# Altium PCB PCB1.PcbDoc
Units mil, origin at the board's own origin, x right, y up, seen from the top; angles counter-clockwise.
Board outline 3005 x 2005 mil, 2 copper layers (Top Layer, Bottom Layer); 13 components, 7 nets, 36 pads, 0 vias.
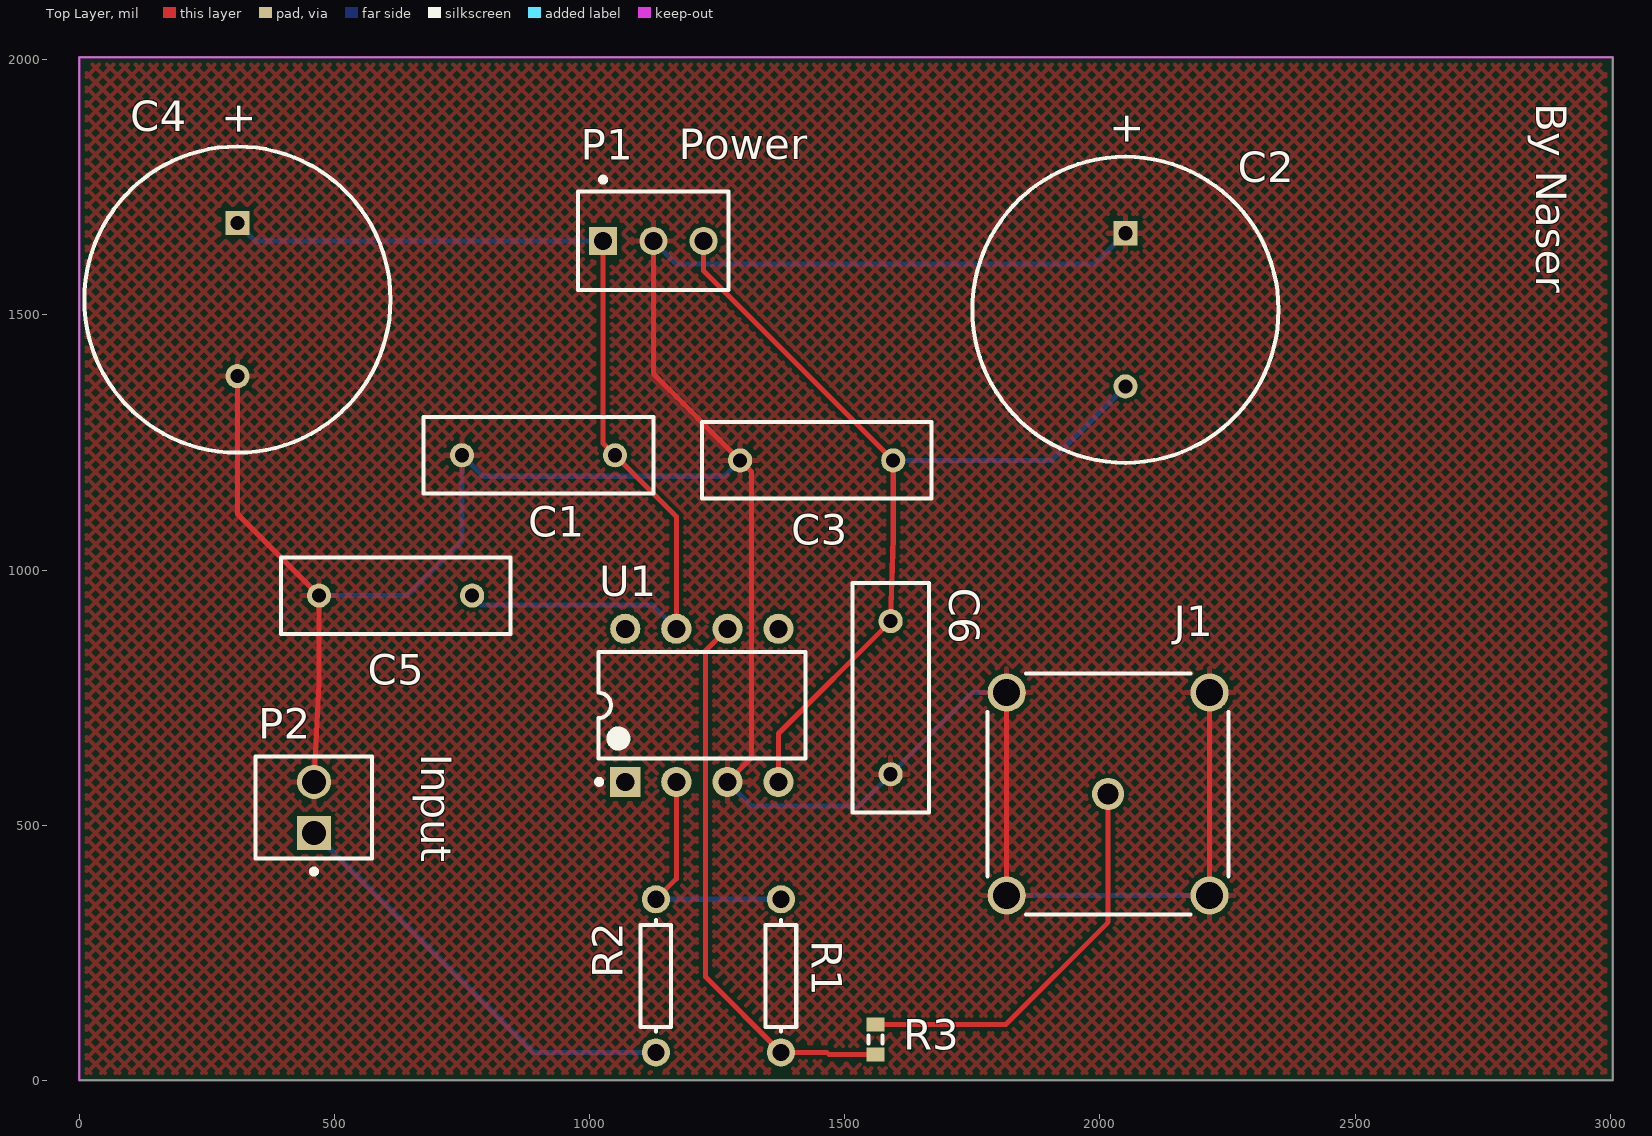
[diagram p0: Top Layer view]
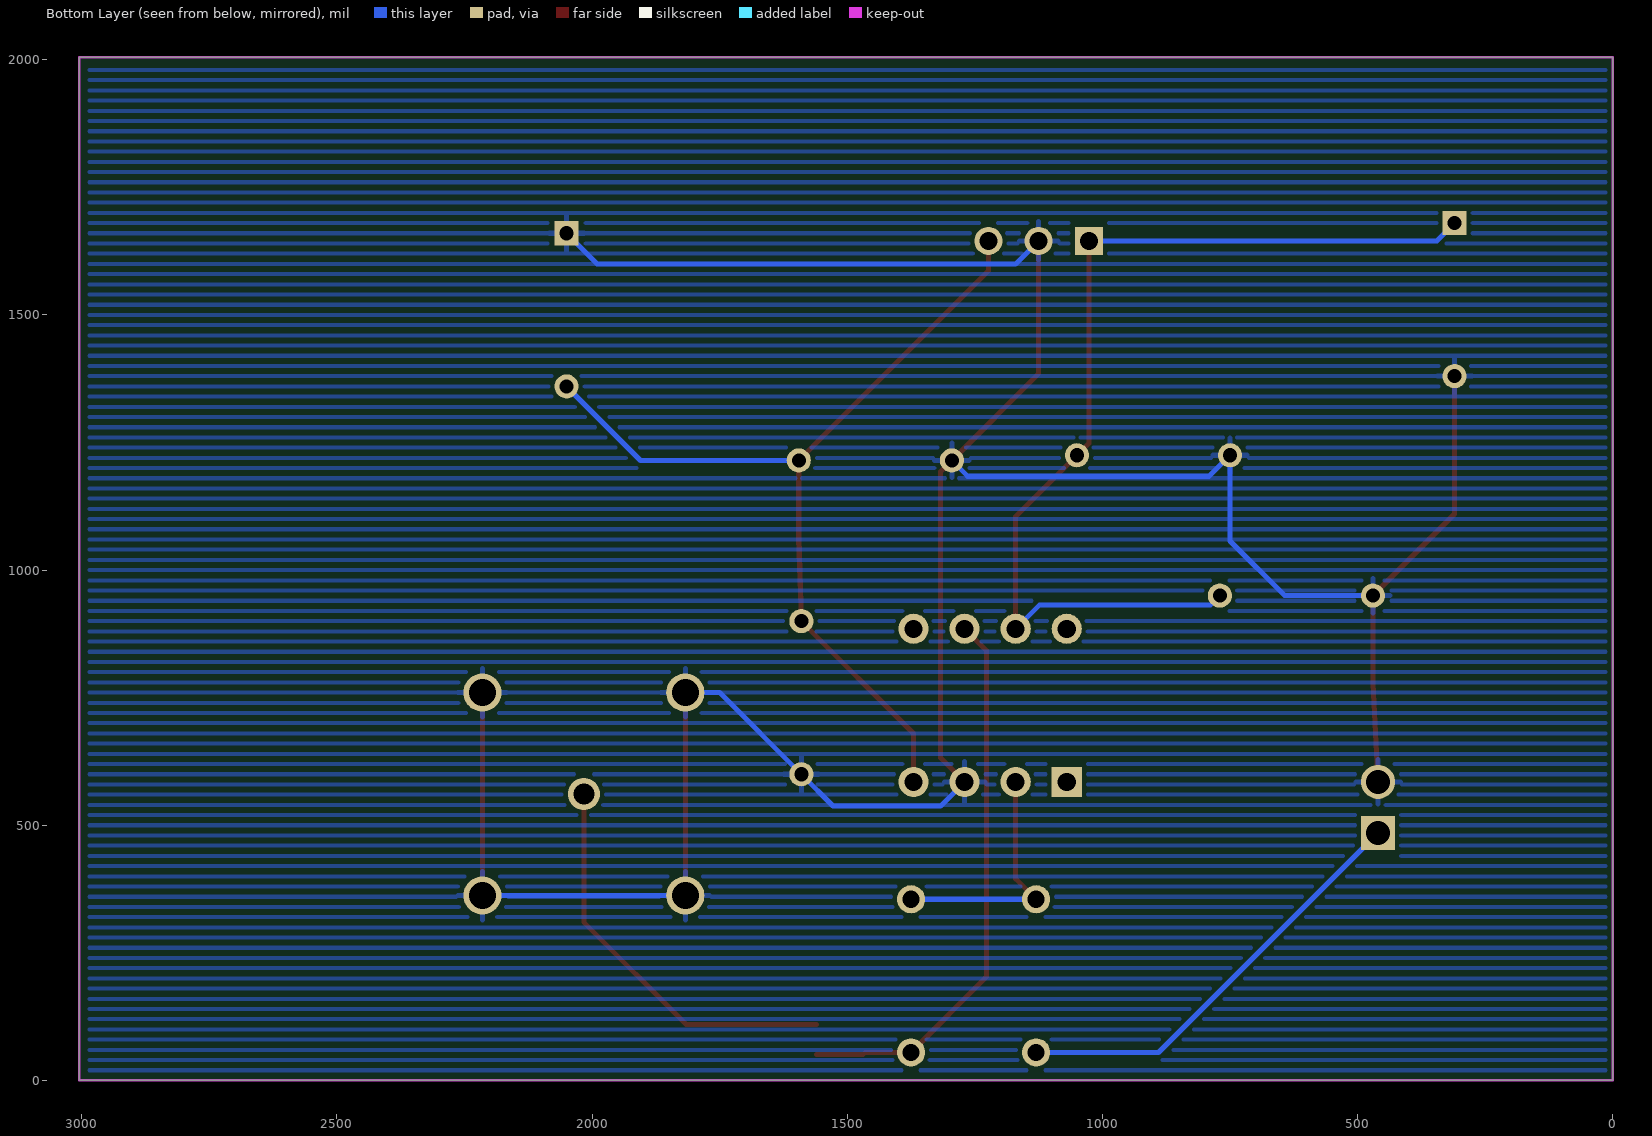
[diagram p1: Bottom Layer view, seen from below]

## Layer stack, top to bottom
Top Solder: solder mask 0.4, Solder Resist, Dk 3.5
Top Layer: signal copper 1.4
Dielectric 1: dielectric 12.6, FR-4, Dk 4.8
Bottom Layer: signal copper 1.4
Bottom Solder: solder mask 0.4, Solder Resist, Dk 3.5

## Board outline
0,0 3005,0 3005,2005 0,2005

## Design rules (kind name [scope] priority, off if disabled: settings)
Clearance [All] p1: gap=8 ignorepadtopadclearanceinfootprint=TRUE
MinimumSolderMaskSliver [All] p1: minsoldermaskwidth=1
PolygonConnect [All] p1: connectstyle=Relief reliefconductorwidth=10 reliefentries=4 polygonreliefangle="90 Angle" airgapwidth=10
RoutingVias [All] p1: holewidth=28 width=50 viastyle="Through Hole" minholewidth=28 minwidth=50 maxholewidth=28 maxwidth=50
SilkToSilkClearance [All] p1: silktosilkclearance=1
SilkToSolderMaskClearance [IsPad] p1: minsilkscreentomaskgap=1 clearancetoexposedcopper=TRUE
SolderMaskExpansion [All] p1: expansion=4 istentingtop=FALSE
Width [All] p1: maxlimit=10 minlimit=10 preferedwidth=10
27 further rules are at their usual default settings.

## Classes and differential pairs
component class power: C1 C2 C3 C4 P1
component class opamp: C5 C6 J1 P2 R1 R2 R3 U1

## Components (designator, comment, footprint, x,y, rotation, side; value= is the part's Value field where it differs from the comment)
C1 "Cap" RAD-0.3 900,1225 r0 top value=100nF
C2 "Cap Pol1" RB7.6-15 2050,1510 r90 top value=100uF
C3 "Cap" RAD-0.3 1445,1215 r0 top value=100nF
C4 "Cap Pol1" RB7.6-15 310,1530 r90 top value=100uF
C5 "Cap" RAD-0.3 620,950 r0 top value=100nF
C6 "Cap" RAD-0.3 1590,750 r90 top value=100nF
J1 "51K204-400A5" ROS-51K204-400A5_V 2016.18,561.18 r270 top
P1 "171825-3" TECO-171825-3_V 1125,1645 r0 top
P2 "22-27-2021" MOLX-22-27-2021_V 460,535 r90 top
R1 "Res1" AXIAL-0.3 1375,205 r270 top value=10K
R2 "Res1" AXIAL-0.3 1130,205 r90 top value=1K
R3 "Res3" J1-0603 1560,80 r90 top value=50
U1 "Op Amp" DIP-8 1220,735 r90 top

## Footprints (in the part's own frame and the unit in brackets; to place one, negate y for a bottom-side part, rotate by r counter-clockwise, add the part's x,y. Pads: shape width x height; smd on the part's side, far side on the other; paste and mask are expansions set on the pad)
AXIAL-0.3 [mm] "Axial Device, Thru-Hole; 2 Leads; 0.3 in Pin Spacing"
  round 1.4 hole 0.85: 1(-3.81,0) 2(3.81,0)
  silkscreen extent -2.77,-0.76 2.77,0.76
DIP-8 [mm] "DIP; 8 Leads; Row Spacing 7.62 mm; Pitch 2.54 mm"
  rect 1.5x1.5 hole 0.9: 1(-3.81,3.81)
  round 1.5 hole 0.9: 2(-3.81,1.27) 3(-3.81,-1.27) 4(-3.81,-3.81) 5(3.81,-3.81) 6(3.81,-1.27) 7(3.81,1.27) 8(3.81,3.81)
  silkscreen extent -3.93,-5.15 2.65,5.23, body extent -3.6,-5.15 3.6,5.15, height 5.08
J1-0603 [mm] "Chip Resistor, Body 1.6x0.8mm, IPC High Density"
  rect 0.7x0.9 smd: 1(-0.75,0) 2(0.75,0)
  silkscreen extent -0.2,-0.35 0.2,0.35, body extent -0.85,-0.48 0.85,0.48, height 0.9
MOLX-22-27-2021_V [mm] "Header, 2-Leads, Body 5.8x5.08mm"
  rect 1.7x1.7 hole 1.19: 1(-1.27,0)
  round 1.7 hole 1.19: 2(1.27,0)
  silkscreen extent -3.31,-2.9 2.54,2.9, body extent -2.54,-2.9 2.54,2.9, height 11.72
RAD-0.3 [mm] "Radial Cap, Thru-Hole; 2 Leads; 0.3 in Pin Spacing"
  round 1.2 hole 0.7: 1(-3.81,0) 2(3.81,0)
  silkscreen extent -5.71,-1.91 5.71,1.91
RB7.6-15 [mm] "Polarized Capacitor (Radial); 2 Leads"
  rect 1.2x1.2 hole 0.7: 1(3.81,0)
  round 1.2 hole 0.7: 2(-3.81,0)
  silkscreen extent -7.62,-7.62 7.62,7.62
ROS-51K204-400A5_V [mm] "BNC 50R Right Angle Jack, 12.5x32.6x14.5mm, Rosenberger Recommended"
  round 1.6 hole 1.05: 1(0,0)
  round 1.9 hole 1.35: MH(-5.05,5.05) MH(-5.05,-5.05) MH(5.05,5.05) MH(5.05,-5.05)
  silkscreen extent -6,-6 6,6, body extent -6.25,-6 6.25,26.6, height 15.25
TECO-171825-3_V [mm] "Connector, 3-Leads, Body 4.9x7.5mm, Pitch 2.5mm"
  rect 1.4x1.4 hole 0.9: 1(-2.5,0)
  round 1.4 hole 0.9: 2(0,0) 3(2.5,0)
  silkscreen extent -3.75,-2.45 3.75,3.17, body extent -3.75,-2.4 3.75,2.5, height 10.4

## Part data
C1 C3 C5 C6: "Capacitor", LatestRevisionDate=17-Jul-2002, LatestRevisionNote="Re-released for DXP Platform.", PackageDescription="Radial Cap, Thru-Hole; 2 Leads; 0.3 in Pin Spacing", PackageReference=RAD-0.3, Published=8-Jun-2000, Publisher="Altium Limited"
C2 C4: "Polarized Capacitor (Radial)", LatestRevisionDate=17-Jul-2002, LatestRevisionNote="Re-released for DXP Platform.", PackageDescription="Polarized Capacitor (Radial); 2 Leads", PackageReference=RB7.6-15, Published=8-Jun-2000, Publisher="Altium Limited"
J1: library part CMP-0753-00004-1, "BNC 50R Right Angle Jack, Panel Feedthrough, Up to 10 GHz, -55 to 155 degC", Manufacturer=Rosenberger, ComponentLink1Description="Manufacturer URL", ComponentLink1URL=http://www.rosenberger.de, ComponentLink2Description=Datasheet, ComponentLink2URL=http://rosenberger.de/ok/images/documents/db/51K204-400A5.pdf, ComponentLink3Description="Package Specification", ComponentLink3URL=http://rosenberger.de/ok/images/documents/db/51K204-400A5.pdf, ComponentLink4Description="Series Overview / Design Note", ComponentLink4URL=http://rosenberger.de/ok/images/documents/spez/51.pdf, ComponentLink5Description="Webshop / RFQ", ComponentLink5URL=http://www.rosenberger.com/en/contact/sales/, DatasheetVersion=d00, Design Note="Footprint in library is a generic example - only application specific footprint delivers High Performance", Mounting Technology="Through Hole", PackageDescription="50R BNC Right Angle Jack, 12.5 x 32.6 x 14.5 mm", PackageReference=51K204-400A5, PackageVersion=d00, PartNumber=51K204-400A5
P1: library part CMP-2000-07494-1, "Male Header, Pitch 2.5 mm, 1 x 3 Position, Height 10.4 mm, Tail Length 3.6 mm,  / -20 to 95 degC / , RoHS, Bulk", Colour=Natural, Contact Resistance=20mOhm, Flammability Rating=UL94V-0, Manufacturer="TE Connectivity", Max Current Rating=3.5A, Max Operating Temperature=95degC, Max Voltage Rating (AC)=250V, Max Voltage Rating (DC)=350.25kV, Min Operating Temperature=-20degC, Package Description="Male Header, Pitch 2.5 mm, 1 x 3 Position, Height 10.4 mm, Tail Length 3.6 mm", Package Quantity=1000, Voltage Rating=350V, Approvals=UL, Backwall/Post Interruptions=No(Without), Connector Type=Header, Contact Gender=Male, Contact Material=Brass, Contact Mating Length=0.295inch, Contact Plating=Tin, Contact Retention=No(Without), Contact Shape=Square, Datasheet URL=http://www.te.com/commerce/DocumentDelivery/DDEController?Action=showdoc&DocId=Customer+Drawing%7F171825%7FY3%7Fpdf%7FEnglish%7FENG_CD_171825_Y3.pdf%7F171825-3, Datasheet Version="Rev. Y3, 12/2016", Depth=4.9mm, Height=0.409inch, Housing Colour=Natural, Housing Material=Nylon, Length=7.5mm, Manufacturer URL=http://www.te.com/, Mating Alignment=Yes(With), Mating Post Length=7.5mm, Mating Retention=Yes(With), Mount=ThroughHole, Mounting Technology=ThroughHole, Number Of Contacts=3, Number of Positions=3, Number Of Rows=1, Orientation=Straight, Package Reference=171825-3, Packaging=Bag, Panel Mount Retention=No(Without), PCB Mount Alignment=No(Without), PCB Mount Retention=Without, PCB Mounting Orientation=Vertical, PCB Thickness=0.063inch, Pitch=2.5mm, Plating Thickness=0.8um, REACH SVHC=NoSVHC, RoHSCompliant=True, Strain Relief=No(Without), Tail Length=0.142inch, Termination=Solder
P2: library part CMP-2000-05537-1, "Male Header, Pitch 2.54 mm, 1 x 2 Position, Height 11.7 mm, Tail Length 3.56 mm, 0 to 75 degC, RoHS, Bulk", Current - Max=4A, Manufacturer=Molex, Operating temperature=0°Cto+75°C, Package Description="2-Leads Header, Body 5.08 x 5.8 mm, Pitch 2.54 mm", Package Version="Rev. BC, 02/2012", PartNumber=0022272021, Voltage - Max=250V, Contact Material=Tinplatedbrass, Current Rating=4A, Datasheet URL=http://www.molex.com/pdm_docs/sd/022272021_sd.pdf, Datasheet Version="Rev. F, 06/2009", Housing Material=Nylon(UL94V-0), Manufacturer URL=http://www.molex.com/, Mounting Technology=ThroughHole, No. of Positions=2, No. of Rows=1, Orientation=Vertical, Package Reference=22-27-2021, Pitch=2.54mm, Voltage Rating=250V
R1 R2 R3: "Resistor", Published=8-Jun-2000, Publisher="Altium Limited"
  R1 R2: LatestRevisionDate=17-Jul-2002, LatestRevisionNote="Re-released for DXP Platform.", PackageDescription="Axial Device, Thru-Hole; 2 Leads; 0.3 in Pin Spacing", PackageReference=AXIAL-0.3
  R3: LatestRevisionDate=29-May-2009, LatestRevisionNote="IPC-7351 Footprint Added.", PackageDescription="Chip Resistor", PackageReference=J1-0603
U1: "FET Operational Amplifier", ComponentLink1Description="Manufacturer Link", ComponentLink1URL=http://www.analog.com/, DatasheetVersion="REV. B", LatestRevisionDate=17-Jul-2002, LatestRevisionNote="Re-released for DXP Platform.", PackageDescription="Can; 8 Leads; Pin Circle Dia. 5.08 mm; Lead Dia. 0.53 mm (max)", PackageReference=H-08A, PackageVersion=1990, Published=8-Jun-2000, Publisher="Altium Limited"

## Nets (pads, with @x,y where several pads share a name; then routed paths per layer and width w, separated by ;. In a path a pad name is that pad's centre, name@x,y a point inside that pad or via, vN(x,y) a via of type N, cw(c..) or ccw(c..) an arc to the next point about the centre after c; other vN are vias at no path point)
+12: C1.2 C4.1 C5.2 P1.1 U1.7 | length 1977.4
  Top Layer w10: P1.1 1026.57,1248.43 C1.2 1170,1105 U1.7
  Bottom Layer w10: C4.1 345,1645 P1.1 ; C5.2 788,932 1123,932 U1.7
-12: C2.2 C3.2 C6.2 P1.3 U1.4 | length 1820.2
  Top Layer w10: P1.3 1223.43,1586.57 C3.2 1595,1063 C6.2 1370,680 U1.4
  Bottom Layer w10: C3.2 1905,1215 C2.2
GND: C1.1 C2.1 C3.1 C4.2 C5.1 C6.1 J1.MH P1.2 P2.2 U1.3 | length 5907.9
  Top Layer w10: C4.2 310,1110 C5.1 470,778 P2.2 ; P1.2 1125,1385 C3.1 1317,1193 1317,632 U1.3 ; J1.MH@1817.36,362.36 J1.MH@1817.36,760 ; J1.MH@2215,362.36 J1.MH@2215,760
  Bottom Layer w10: C5.1 643,950 750,1057 C1.1 791,1184 1264,1184 C3.1 ; P1.2 1170,1600 1990,1600 C2.1 ; U1.3 1317,538 1528,538 C6.1 1750,760 J1.MH@1817.36,760 ; J1.MH@1817.36,362.36 J1.MH@2215,362.36
Input: P2.1 R2.1 | length 848.1
  Bottom Layer w10: P2.1 890,55 R2.1
NetJ1_1: J1.1 R3.2 | length 790.3
  Top Layer w10: R3.2 1815.53,109.53 2016.18,310.18 J1.1
NetR1_1: R1.1 R2.2 U1.2 | length 491.6
  Top Layer w10: R2.2 1170,395 U1.2
  Bottom Layer w10: R2.2 R1.1
NetR1_2: R1.2 R3.1 U1.6 | length 1096
  Top Layer w10: U1.6 1227,842 1227,203 R1.2 1465,55 1469.53,50.47 R3.1
pads on no net: U1.1 U1.5 U1.8

## Polygon pours and split planes (outlines as drawn)
GND on Top Layer "GND_L01_P001" (hatched 45Degree grid 20 track 8, remove dead copper, pour order 1): 0,2005 3005,2005 3000,2000 3000,5 2995,0 0,0
GND on Top Layer "GND_L01_P000" (hatched Horizontal grid 20 track 8, remove dead copper, pour order 0): 1790,1760
GND on Bottom Layer "GND_L02_P002" (hatched Horizontal grid 20 track 8, remove dead copper, pour order 2): 10,2000 2985,2000 2985,10 10,10

## Keep-outs
Keep-Out Layer:
  the board outline again, w5

## Silkscreen, mask and mechanical layers (free items; w line width, h text height)
Top Overlay:
  text "By Naser" at 2854.99,1915 h60 r270
  text "Power" at 1175,1805 h60
  text "Input" at 669.99,640 h60 r270

## Text inside footprints (layer, text, board x,y; h text height)
C2: Top Overlay "+" at 2079.01,1830.15 h59.06 r90
C4: Top Overlay "+" at 339.01,1850.15 h59.06 r90